# Altium PCB SI7051-A20.PcbDoc
Units mil, origin at the board's own origin, x right, y up, seen from the top; angles counter-clockwise.
Board outline 455 x 425 mil, 2 copper layers (Top Layer, Bottom Layer); 5 components, 7 nets, 17 pads, 1 vias.
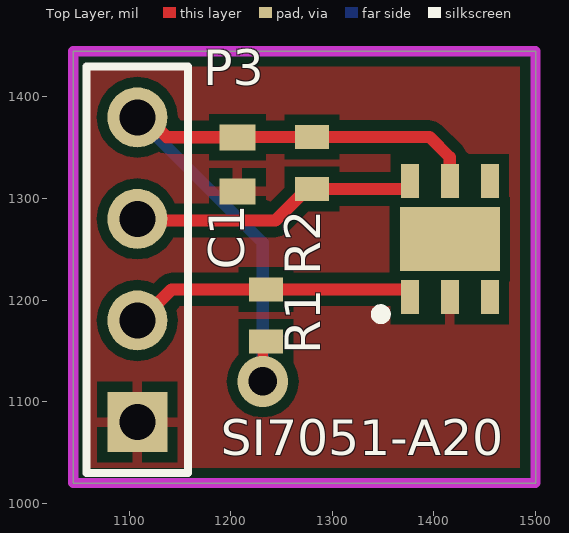
[diagram p0: Top Layer view]
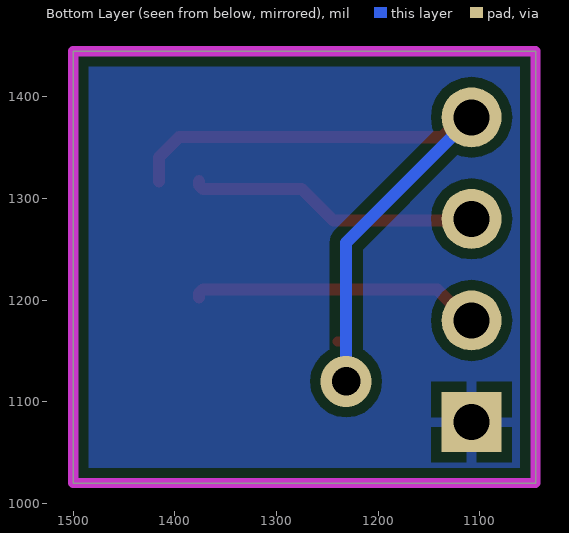
[diagram p1: Bottom Layer view, seen from below]
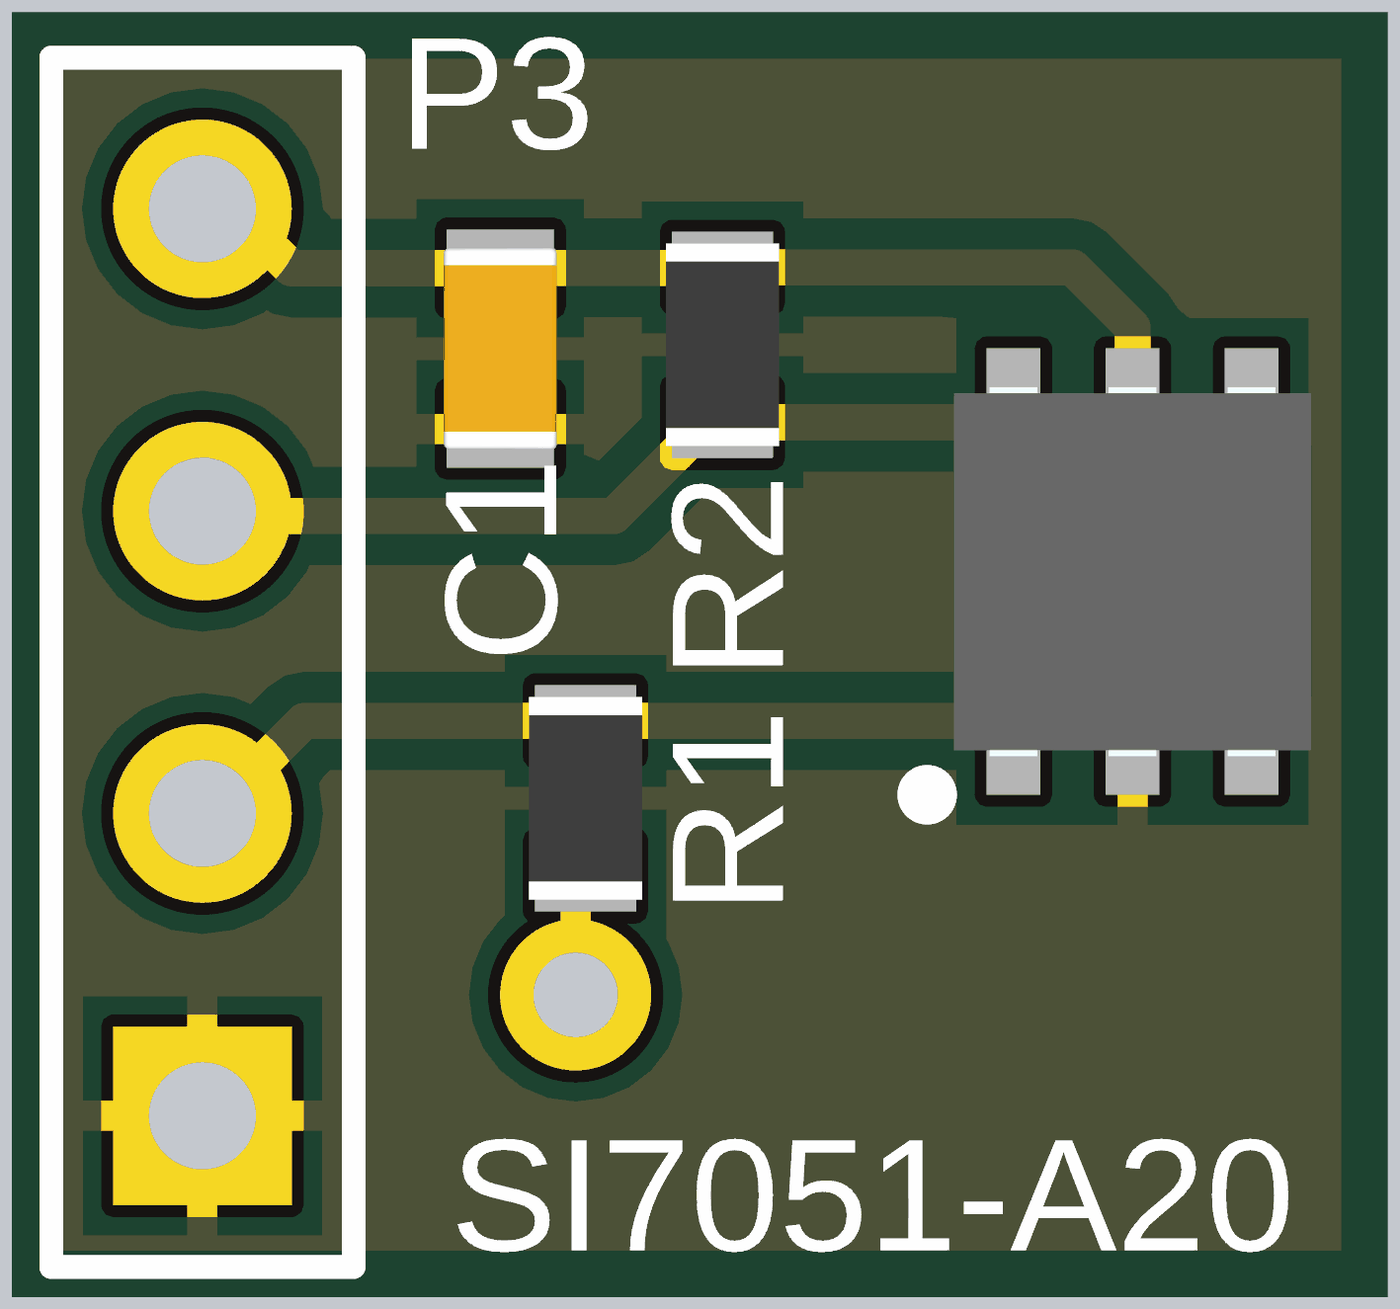
[diagram p2: 3D render of the assembled board from above, using the file's embedded part models]

## Layer stack, top to bottom
Top Solder: solder mask 0.4, Solder Resist, Dk 3.5
Top Layer: signal copper 1.4
Dielectric 1: dielectric 12.6, FR-4, Dk 4.8
Bottom Layer: signal copper 1.4
Bottom Solder: solder mask 0.4, Solder Resist, Dk 3.5

## Board outline
1045,1020 1500,1020 1500,1445 1045,1445

## Design rules (kind name [scope] priority, off if disabled: settings)
Clearance [All] p1: gap=10 ignorepadtopadclearanceinfootprint=FALSE except(0: Arc-Hole Track-Hole SMDPad-Hole THPad-Hole Via-Hole Fill-Hole Poly-Hole Region-Hole Text-Hole; 8: SMDPad-SMDPad)
MinimumSolderMaskSliver [All] p1 off: minsoldermaskwidth=10
PolygonConnect [All] p1: connectstyle=Relief reliefconductorwidth=10 reliefentries=4 polygonreliefangle="90 Angle" airgapwidth=10
RoutingVias [All] p1: holewidth=28 width=50 viastyle="Through Hole" minholewidth=28 minwidth=50 maxholewidth=28 maxwidth=50
SilkToSilkClearance [All] p1 off: silktosilkclearance=10
SilkToSolderMaskClearance [IsPad] p1 off: minsilkscreentomaskgap=10 clearancetoexposedcopper=TRUE
SolderMaskExpansion [All] p1: expansion=4
Width [All] p1: maxlimit=20 minlimit=10 preferedwidth=12 minimp=50.000000 maximp=50.000000 favimp=50.000000
27 further rules are at their usual default settings.

## Components (designator, comment, footprint, x,y, rotation, side; value= is the part's Value field where it differs from the comment)
C1 "0.1uF" C0603_L 1206.54,1333.78 r90 top
P3 "Header 4" HDR1X4 1108.02,1080 r90 top
R1 "10K" R0603_L 1234.7,1185 r270 top
R2 "10K" R0603_L 1280,1335 r90 top
SI7051-A20 "SI7051-A20-IMR" SON100P300X300X80-7N-D 1415.63,1260 r90 top

## Footprints (in the part's own frame and the unit in brackets; to place one, negate y for a bottom-side part, rotate by r counter-clockwise, add the part's x,y. Pads: shape width x height; smd on the part's side, far side on the other; paste and mask are expansions set on the pad)
C0603_L [mm] "Chip Capacitor, 2-Leads, Body 1.60x0.82mm, IPC High Density"
  rect 0.65x0.9 smd: 1(-0.675,0) 2(0.675,0)
  body extent -0.85,-0.48 0.85,0.48, height 0.6
HDR1X4 [mm] "Connector; Header; 4 Position"
  rect 1.5x1.5 hole 0.9: 1(0,0)
  round 1.5 hole 0.9: 2(2.54,0) 3(5.08,0) 4(7.62,0)
  silkscreen extent -1.27,-1.27 8.89,1.27
R0603_L [mm] "Chip Resistor, 2-Leads, Body 1.60x0.82mm, IPC High Density"
  rect 0.6x0.85 smd: 1(-0.65,0) 2(0.65,0)
  body extent -0.85,-0.48 0.85,0.48, height 0.6
SON100P300X300X80-7N-D [mm]
  rect 0.85x0.45 smd: 1(-1.45,1) 2(-1.45,0) 3(-1.45,-1) 4(1.45,-1) 5(1.45,0) 6(1.45,1)
  rect 1.6x2.5 smd: 7(0,0)
  silkscreen extent -2,1.6 -1.75,1.85, body extent -1.55,-1.5 1.55,1.5, height 0.8

## Part data
C1: library part C_SMD
P3: "Header, 4-Pin", LatestRevisionDate=17-Jul-2002, LatestRevisionNote="Re-released for DXP Platform.", Publisher="Altium Limited"
R1 R2: library part R_SMD
SI7051-A20: "Integrated Circuit", Manufacturer_Name="Silicon Labs", Mouser Part Number=634-SI7051-A20-IMR, Arrow Part Number=SI7051-A20-IMR, Arrow Price/Stock=https://www.arrow.com/en/products/si7051-a20-imr/silicon-labs, Datasheet Link=https://componentsearchengine.com/Datasheets/1/SI7051-A20-IMR.pdf, Height=0.8mm, Manufacturer_Part_Number=SI7051-A20-IMR, Mouser Price/Stock=https://www.mouser.co.uk/ProductDetail/Silicon-Labs/SI7051-A20-IMR?qs=j6MGy4L9yX2zSJWGGFfXqQ%3D%3D

## Via types
v1: diameter 50, hole 28, Top Layer to Bottom Layer, 1 vias

## Nets (pads, with @x,y where several pads share a name; then routed paths per layer and width w, separated by ;. In a path a pad name is that pad's centre, name@x,y a point inside that pad or via, vN(x,y) a via of type N, cw(c..) or ccw(c..) an arc to the next point about the centre after c; other vN are vias at no path point)
3V3: C1.2 P3.4 R1.2 R2.2 SI7051-A20.5 | length 704.5
  Top Layer w10: v1(1231.46,1120) 1231.46,1156.17 R1.2 R1.2@1239.62,1159.41
  Top Layer w12: P3.4 1117.73,1380 1137.38,1360.35 C1.2 1206.65,1360.47 1279.88,1360.47 R2.2 1395.77,1360.59 1415.63,1340.73 SI7051-A20.5
  Bottom Layer w12: P3.4 1231.46,1256.56 v1(1231.46,1120)
5V: 
A1: 
A3: 
A4: P3.2 R1.1 SI7051-A20.1 | length 286.3
  Top Layer w12: P3.2 1111.03,1180 1141.62,1210.59 R1.1 1372.4,1210.59 1376.26,1206.73 SI7051-A20.1
A5: P3.3 R2.1 SI7051-A20.6 | length 287.2
  Top Layer w12: P3.3 1109.61,1278.41 1244.08,1278.41 1275.08,1309.41 1372.4,1309.41 1376.26,1313.27 SI7051-A20.6
GND: C1.1 P3.1 SI7051-A20.2
pads on no net: SI7051-A20.3 SI7051-A20.4 SI7051-A20.7

## Polygon pours and split planes (outlines as drawn)
GND on Top Layer "Top Layer-GND" (solid, pour order 0): 1045,1440 1500,1440 1500,1100 1500,1020 1049.33,1020
GND on Bottom Layer "Bottom Layer-GND" (solid, pour order 2): 1045,1440 1500,1440 1500,1020 1045,1020

## Keep-outs
Keep-Out Layer:
  the board outline again, w10